# Altium PCB Buck_Boost Converter.PcbDoc
Units mil, origin at the board's own origin, x right, y up, seen from the top; angles counter-clockwise.
Board outline 6095 x 3605 mil, 2 copper layers (Top Layer, Bottom Layer); 28 components, 19 nets, 83 pads, 0 vias.
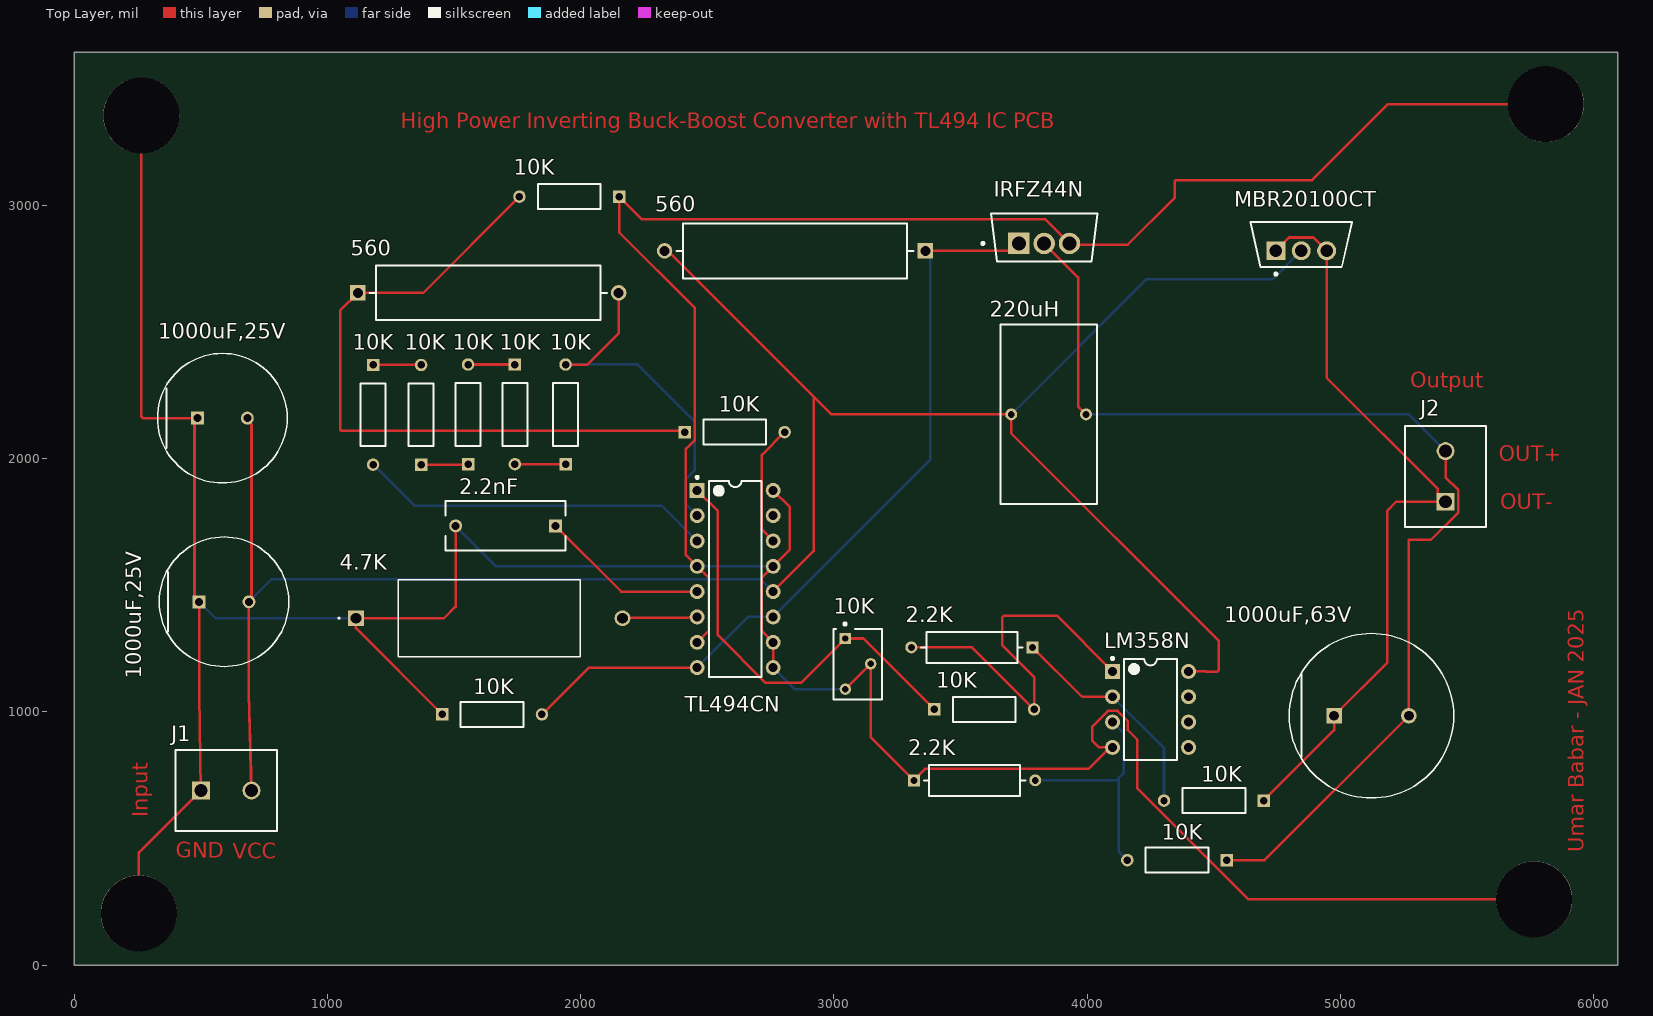
[diagram p0: Top Layer view]
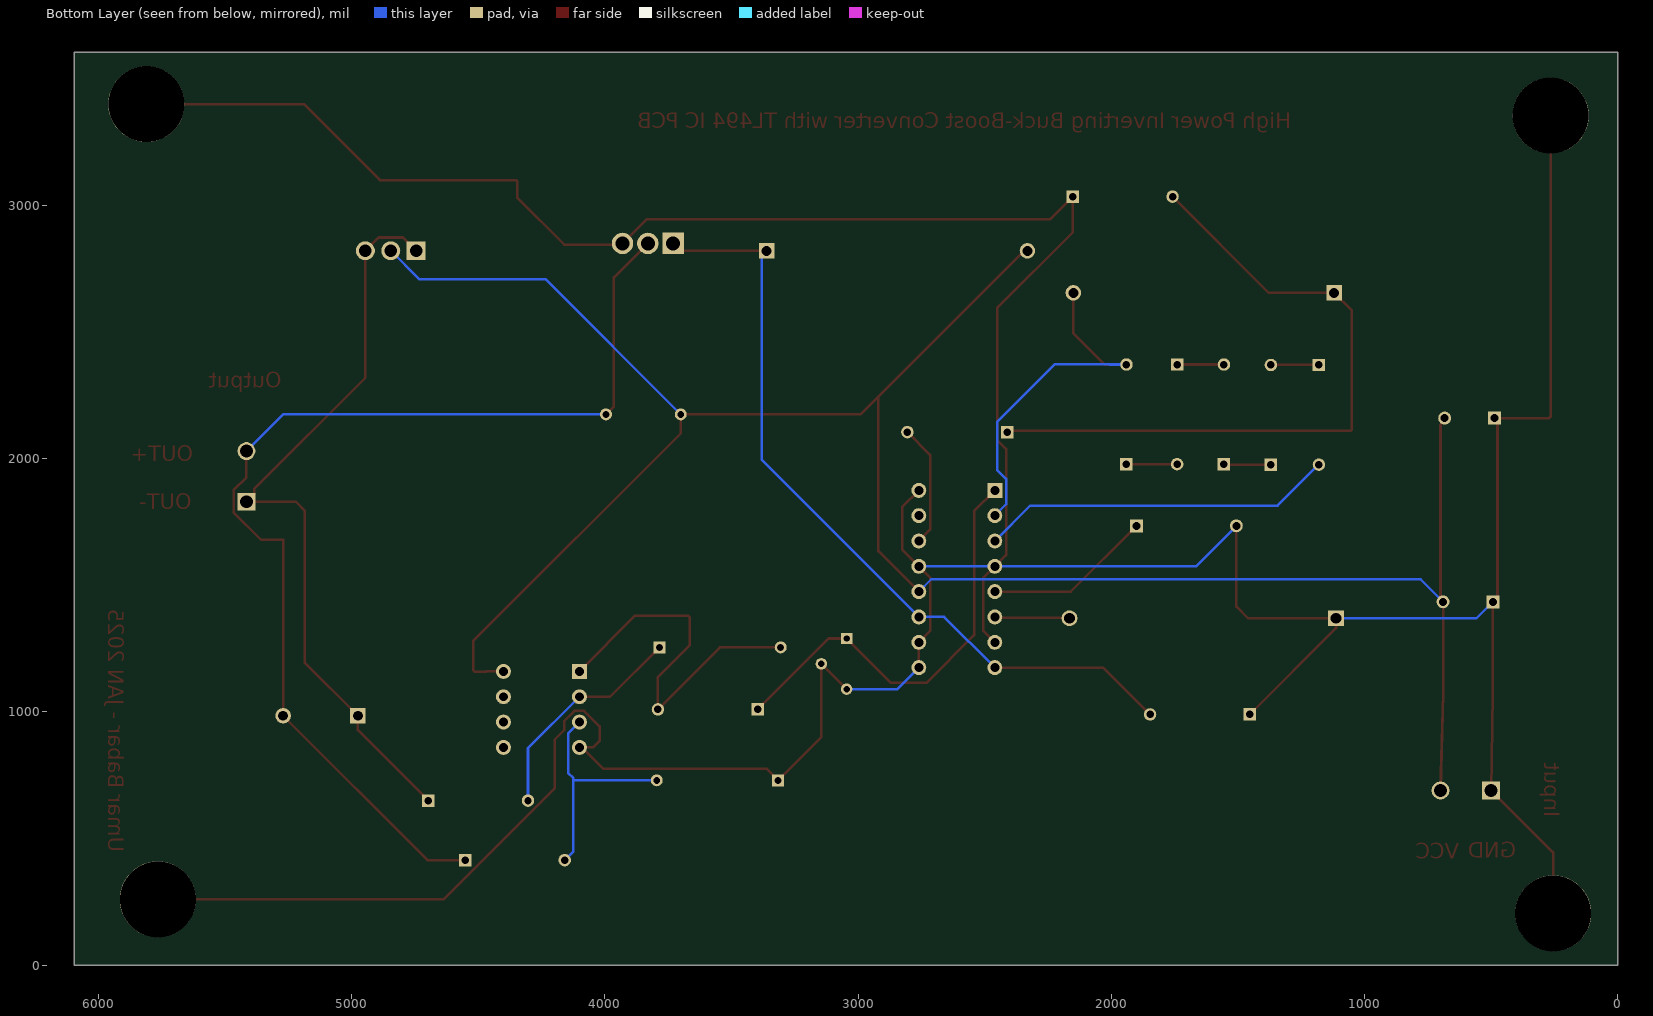
[diagram p1: Bottom Layer view, seen from below]
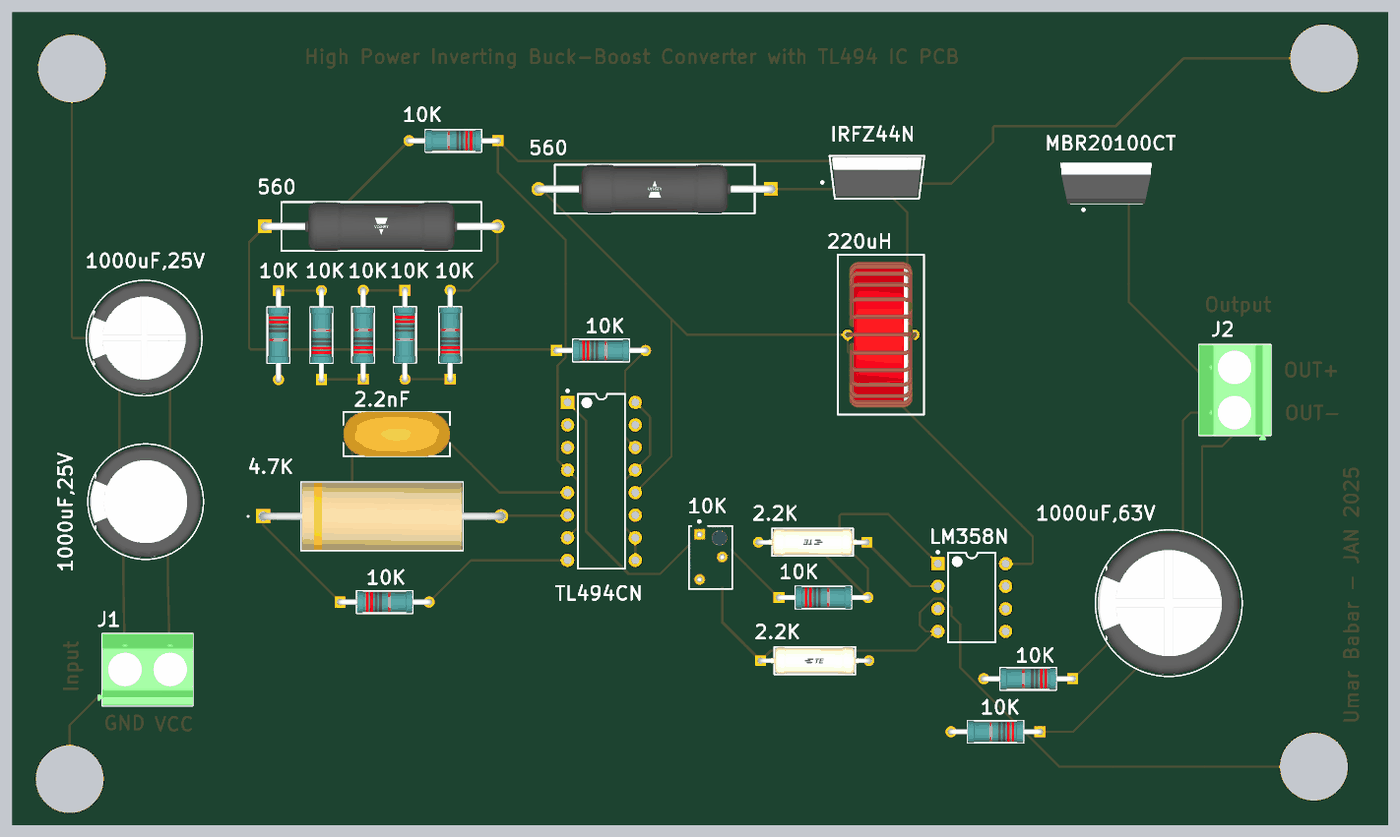
[diagram p2: 3D render of the assembled board from above, using the file's embedded part models]

## Layer stack, top to bottom
Top Solder: solder mask 0.4, Solder Resist, Dk 3.5
Top Layer: signal copper 1.4
Dielectric 1: dielectric 12.6, FR-4, Dk 4.8
Bottom Layer: signal copper 1.4
Bottom Solder: solder mask 0.4, Solder Resist, Dk 3.5

## Board outline
0,0 6095,0 6095,3605 0,3605

## Design rules (kind name [scope] priority, off if disabled: settings)
Clearance [All] p1: gap=10 ignorepadtopadclearanceinfootprint=FALSE
HoleSize [All] p1: absolutevalues=TRUE maxlimit=300 minlimit=1 maxpercent=80.000 minpercent=20.000
PolygonConnect [All] p1: connectstyle=Relief reliefconductorwidth=10 reliefentries=4 polygonreliefangle="90 Angle" airgapwidth=10
RoutingVias [All] p1: holewidth=28 width=50 viastyle="Through Hole" minholewidth=28 minwidth=50 maxholewidth=28 maxwidth=50
SolderMaskExpansion [All] p1: expansion=4 istentingtop=FALSE
SupplyNets "Schematic Supply Nets" [InNet('GND')] p1: voltage=0.000
Width [All] p1: maxlimit=10 minlimit=10 preferedwidth=10
29 further rules are at their usual default settings.

## Components (designator, comment, footprint, x,y, rotation, side; value= is the part's Value field where it differs from the comment)
2.2K "2.2K Ohms" FP-CFR50J2K2-MFG 3555,730 r0 top (schematic designator R14)
2.2K "2.2K Ohms" FP-CFR50J2K2-MFG 3545,1255 r180 top (schematic designator R12)
2.2nF "2.2 nF" FP-VY1470-MFG 1703.15,1735 r180 top (schematic designator C3)
4.7K "4.7K Ohms" RES_AC05_VIS 1112,1370 r0 top (schematic designator R10)
10K "10K Ohms" FP-MBB0207-MFG 1650,990 r0 top (schematic designator R17)
10K "10K Ohms" FP-3266W-MFG 3093.43,1187.83 r270 top value=10kΩ (schematic designator R16)
10K "10K Ohms" FP-MBB0207-MFG 3593.15,1010 r0 top (schematic designator R15)
10K "10K Ohms" FP-MBB0207-MFG 4355,415 r180 top (schematic designator R13)
10K "10K Ohms" FP-MBB0207-MFG 4500,650 r180 top (schematic designator R11)
10K "10K Ohms" FP-MBB0207-MFG 1180,2173.15 r270 top (schematic designator R8)
10K "10K Ohms" FP-MBB0207-MFG 1370,2173.15 r90 top (schematic designator R7)
10K "10K Ohms" FP-MBB0207-MFG 1555,2175 r90 top (schematic designator R6)
10K "10K Ohms" FP-MBB0207-MFG 1740,2175 r270 top (schematic designator R5)
10K "10K Ohms" FP-MBB0207-MFG 1940,2175 r90 top (schematic designator R4)
10K "10K Ohms" FP-MBB0207-MFG 1955,3035 r180 top (schematic designator R2)
10K "10K Ohms" FP-MBB0207-MFG 2608.15,2105 r0 top (schematic designator R1)
220uH "220uH" 744115 3847.64,2175 r270 top (schematic designator L1)
560 "560 Ohms" FP-PAC03-MFG 2846.08,2820.62 r180 top (schematic designator R9)
560 "560 Ohms" FP-PAC03-MFG 1635,2655 r0 top (schematic designator R3)
1000uF,25V "1000uf, 25V" FP-RAD-TH-D_12_5_0_5-L_20-MFG 591.57,1435 r0 top (schematic designator C2)
1000uF,25V "1000uf, 25V" FP-RAD-TH-D_12_5_0_5-L_20-MFG 585,2160 r0 top (schematic designator C1)
1000uF,63V "1000uf, 63V" FP-RAD-TH-D_16_0_5-L_25_2-MFG 5122.36,985 r0 top (schematic designator C4)
IRFZ44N "IRFZ44N" FP-PG-TO262-3-MFG 3830,2872.93 r90 top (schematic designator Q1)
J1 "1729128" PHOE-1729128-2_V 600,690 r0 top
J2 "1729128" PHOE-1729128-2_V 5415,1930 r90 top
LM358N "LM358N" ONSC-PDIP-8-626-05_M 4250,1010 r0 top (schematic designator U2)
MBR20100CT "MBR20100CT" FP-MBR20100CT-E3-4W-MFG 4845,2845 r90 top (schematic designator D1)
TL494CN "TL494CN" N0016A 2610,1525 r0 top (schematic designator U1)

## Footprints (in the part's own frame and the unit in brackets; to place one, negate y for a bottom-side part, rotate by r counter-clockwise, add the part's x,y. Pads: shape width x height; smd on the part's side, far side on the other; paste and mask are expansions set on the pad)
744115 [mm] "THT Leaded Toroidal Storage Choke, body 18x9.7mm"
  round 1.2 hole 0.7: 1(0,3.75) 2(0,-3.75)
  silkscreen extent -9,-4.85 9,4.85, body extent -8.21,-4 8.21,4, height 16.21
FP-3266W-MFG [mm]
  rect 1.15x1.15 hole 0.65 paste-2539.97 mask+0: 1(-2.595,-1.23)
  round 1.15 hole 0.65 paste-2539.97 mask+0: 2(-0.055,1.31) 3(2.485,-1.23)
  silkscreen extent -4.17,-2.44 3.54,2.44, body extent -3.64,-2.54 3.64,2.54, height 0.25
FP-CFR50J2K2-MFG [mm]
  rect 1.2x1.2 hole 0.7 paste-2539.97 mask+0: 1(-6.09,0)
  round 1.2 hole 0.7 paste-2539.97 mask+0: 2(6.09,0)
  silkscreen extent -5.09,-1.55 5.09,1.55, body extent -6.79,-1.65 6.79,1.65, height 0.25
FP-MBB0207-MFG [mm]
  rect 1.25x1.25 hole 0.75 paste-2539.97 mask+0: 1(-5,0)
  round 1.25 hole 0.75 paste-2539.97 mask+0: 2(5,0)
  silkscreen extent -3.15,-1.25 3.15,1.25, body extent -5.72,-1.35 5.72,1.35, height 0.25
FP-MBR20100CT-E3-4W-MFG [mm]
  rect 1.9x1.9 hole 1.25 paste-2539.97 mask+0: 1(-0.61,2.55)
  round 1.9 hole 1.25 paste-2539.97 mask+0: 2(-0.61,0) 3(-0.61,-2.55)
  silkscreen extent -3.07,-5.08 2.25,5.08, body extent -2.45,-5.37 2.45,5.37, height 0.25
FP-PAC03-MFG [mm]
  rect 1.55x1.55 hole 1 paste-2539.97 mask+0: 1(-13.08,0)
  round 1.55 hole 1 paste-2539.97 mask+0: 2(13.08,0)
  silkscreen extent -11.9,-2.75 11.9,2.75, body extent -13.95,-2.85 13.95,2.85, height 0.25
FP-PG-TO262-3-MFG [mm]
  rect 2.15x2.15 hole 1.4 paste-2539.97 mask+0: 1(-0.583,2.54)
  round 2.15 hole 1.4 paste-2539.97 mask+0: 2(-0.583,0) 3(-0.583,-2.54)
  silkscreen extent -2.42,-5.34 2.42,6.27, body extent -2.51,-5.56 2.51,5.56, height 0.25
FP-RAD-TH-D_12_5_0_5-L_20-MFG [mm]
  rect 1.3x1.3 hole 0.8 paste-2539.97 mask+0: 1(-2.5,0)
  round 1.3 hole 0.8 paste-2539.97 mask+0: 2(2.5,0)
  silkscreen extent -6.5,-6.5 6.5,6.5, body extent -6.6,-6.6 6.6,6.6, height 0.25
FP-RAD-TH-D_16_0_5-L_25_2-MFG [mm]
  rect 1.55x1.55 hole 1 paste-2539.97 mask+0: 1(-3.75,0)
  round 1.55 hole 1 paste-2539.97 mask+0: 2(3.75,0)
  silkscreen extent -8.25,-8.25 8.25,8.25, body extent -8.35,-8.35 8.35,8.35, height 0.25
FP-VY1470-MFG [mm]
  rect 1.3x1.3 hole 0.8 paste-2539.97 mask+0: 1(-5,0)
  round 1.3 hole 0.8 paste-2539.97 mask+0: 2(5,0)
  silkscreen extent -6,-2.5 6,2.5, body extent -6.1,-2.6 6.1,2.6, height 0.25
N0016A [mm] "DIP, 16-Leads, Body 19.7x6.6mm, Pitch 2.54mm"
  rect 1.5x1.5 hole 0.9: 1(-3.81,8.89)
  round 1.5 hole 0.9: 2(-3.81,6.35) 3(-3.81,3.81) 4(-3.81,1.27) 5(-3.81,-1.27) 6(-3.81,-3.81) 7(-3.81,-6.35) 8(-3.81,-8.89) 9(3.81,-8.89) 10(3.81,-6.35) 11(3.81,-3.81) 12(3.81,-1.27) 13(3.81,1.27) 14(3.81,3.81) 15(3.81,6.35) 16(3.81,8.89)
  silkscreen extent -3.93,-9.85 2.65,10.31, body extent -3.95,-9.85 3.95,9.85, height 5.08
ONSC-PDIP-8-626-05_M [mm] "DIP, 8-Leads, Body 10x7.1mm, Pitch 2.54mm"
  rect 1.5x1.5 hole 0.9: 1(-3.81,3.81)
  round 1.5 hole 0.9: 2(-3.81,1.27) 3(-3.81,-1.27) 4(-3.81,-3.81) 5(3.81,-3.81) 6(3.81,-1.27) 7(3.81,1.27) 8(3.81,3.81)
  silkscreen extent -3.93,-5.05 2.65,5.23, body extent -3.95,-5 3.95,5, height 5.33
PHOE-1729128-2_V [mm] "Receptacle, 2-Leads, Body 8.1x10.16mm, Pitch 5.08mm"
  rect 1.8x1.8 hole 1.3: 1(-2.54,0)
  round 1.8 hole 1.3: 2(2.54,0)
  silkscreen extent -5.08,-4.05 5.08,4.05, body extent -5.65,-4.05 5.08,4.05, height 10.01
RES_AC05_VIS [mil]
  rect 63x63 / inner round 60 / far side rect 63x63 hole 43 paste-99999 mask+0: 1(0,0)
  round 63 / inner round 60 / far side round 63 hole 43 paste-99999 mask+0: 2(1053,0)
  silkscreen extent -69,-152 886,152, body extent -16,-147 1069,147, height 295

## Part data
2.2K 2.2K: library part CMP-03212-000011-1, "RES 2.2K OHM 5% 1/2W AXIAL", Case/Package=Axial, Max Operating Temperature=155°C, Max Power Dissipation=500mW, Min Operating Temperature=-55°C, Number of Resistors=1, Package Quantity=3000, Resistance=2.2kR, Resistance Tolerance=5%, Resistor Type="Thin Film", Temperature Coefficient=0ppm/°C, Voltage Rating=350V, Diameter=3mm, ELV=Compliant, Length=9mm, Mount=Axial, Number of Terminations=2, Packaging="Cut Tape", Power Rating=500mW, Radiation Hardening=No, REACH SVHC="No SVHC", RoHS Compliant=Yes, Series="CFR50, Neohm", Technology="CARBON FILM", Termination=Axial, Tolerance=5%, Voltage Rating (DC)=350V
2.2nF: library part CMP-02417-000069-1, "CAP CER 2200PF 760VAC Y5U RADIAL", Capacitance=2.2nF, Case/Package=Radial, Dielectric=Y5U, Max Operating Temperature=125°C, Min Operating Temperature=-40°C, Package Quantity=500, Ratings=X1, Resistor Type=Ceramic, Tolerance=20%, Voltage=500V, Construction=RADIAL, Contact Plating=Tin, Depth=5mm, Diameter=12mm, Height=15mm, Height - Seated (Max)=0.63inch, Lead Diameter=0.6mm, Lead Free="Lead Free", Lead Pitch=10mm, Lead/Base Style=Kinked, Mount="Through Hole", Packaging="Tape and Reel", Radiation Hardening=No, RoHS Compliant=Yes, Series=VY1, Termination=Radial, Thickness=5mm, Voltage Rating (AC)=500V, Voltage Rating (DC)=500V, Width=5mm
4.7K: library part CMP-00030-39747417-1, "AC05000004701JAC00 VISHAY AC05000004701JAC00 Through Hole Resistor, AC Series, 4.7 kohm, 5 W, 5%, Axial Leaded", Case/Package=Conformal, Max Operating Temperature=275°C, Max Power Dissipation=5W, Min Operating Temperature=-40°C, Resistance=4.7kΩ, Temperature Coefficient=180ppm/°C, Tolerance=5%, Voltage Rating=153V, Composition=Wirewound, Contact Plating=Tin, Diameter=7.5mm, Features="Flame Retardant Coating", Lead Diameter=800µm, Lead Free="Lead Free", Length=18mm, Military Standard=Not, NexarPartId=39747417, Number of Pins=2, Number of Terminations=2, Packaging="Tape & Box (TB)", Power Rating=5W, Radiation Hardening=No, REACH SVHC=Unknown, RoHS=Compliant, Schedule B="8533210080, 8533210080", Termination=Axial, Voltage Rating (DC)=153V, Width=7.49mm
10K 10K 10K 10K 10K 10K 10K 10K 10K 10K 10K: library part CMP-02408-000035-1, "RES 10K OHM 0.6W 1% AXIAL", Case/Package=Conformal, Max Operating Temperature=155°C, Max Power Dissipation=600mW, Min Operating Temperature=-55°C, Resistance=10kR, Resistance Tolerance=1%, Resistor Type="Metal Film", Temperature Coefficient=50ppm/°C, Voltage Rating=300V, Construction=Cylindrical, Contact Plating=Tin, Diameter=2.5mm, Features="Automotive AEC-Q200", Lead Free="Lead Free", Length=6.5mm, Military Standard=Not, Number of Terminations=2, Packaging="Tape and Reel", Power Rating=600mW, Radiation Hardening=No, RoHS Compliant=Yes, Series="MBB 0207 - Professional", Technology="THIN FILM", Termination=Axial, Tolerance=1%, Voltage Rating (DC)=300V
10K: library part CMP-07234-000016-1, "TRIMMER 10K OHM 0.25W PC PIN TOP", Manufacturer=Bourns, Manufacturer Part Number=3266W-1-103LF, Package=3266W, Power Rating=0.25W, Resistance=10kΩ, Temperature="-55°C to +125°C", Temperature Coefficient=100ppm/°C, Temperature Range High=+125°C, Temperature Range Low=-55°C, Tolerance=10%, Automotive=No, Category=Res, ComponentLink2Description=Datasheet, ComponentLink2URL=https://www.bourns.com/docs/Product-Datasheets/3266.pdf, Composition=Cermet, Device Class L1="Passive Components", Device Class L2=Resistors, Device Class L3="Variable Resistors and Potentiometers", Digikey Description="TRIMMER 10K OHM 0.25W PC PIN TOP", Height=9.02mm, Lead Free=Yes, Mouser Description="Trimmer Resistors - Through Hole 1/4 10Kohms 10% SQ W/Standoff Sealed", Octopart=https://octopart.com/3266w-1-103lf-bourns-81445, RoHS=TRUE, Series=3266, Standoff Height=0.43mm
220uH: library part CMP-03913-22803288-1, "744115 200 µH ±20% Ferrite Toroidal Inductor, 2.2A Idc, 180mO Rdc WE-SI", Ambient Temperature Range High=65°C, Ambient Temperature Range Low=-40°C, Case/Package=Radial, Current Rating=2.2A, DC Resistance (DCR)=180mΩ, Inductance=200µH, Max DC Current=1A, Max Operating Temperature=105°C, Saturation Current=900mA, Self Resonant Frequency=3MHz, Test Frequency=10kHz, Tolerance=20%, Core Material=Ferrite, Depth=9mm, Diameter=18mm, Height=20mm, Lead Pitch=7.5mm, Length=18mm, Min Operating Temperature=-40°C, Mount="Through Hole, Wire", NexarPartId=22803288, Packaging=Bulk, Pin Length=20mm, Pitch=500µm, RoHS=Compliant, Shielding=Unshielded, Width=9.7mm
560 560: library part CMP-02408-000023-1, "RES 560 OHM 3W 1% AXIAL", Case/Package=Axial, Max Operating Temperature=275°C, Max Power Dissipation=3W, Min Operating Temperature=-55°C, Package Quantity=1, Resistance=560R, Resistor Type=Wirewound, Temperature Coefficient=100ppm/°C, Tolerance=1%, Contact Plating=Tin, Diameter=5.5mm, Features="Flame Retardant Coating", Length=0.65inch, Mount="Through Hole", Number of Terminations=2, Packaging="Cut Tape", Power Rating=3W, Radiation Hardening=No, RoHS Compliant=Yes, Series=PAC
1000uF,25V 1000uF,25V: library part CMP-05427-000606-1, "Aluminum Electrolytic Capacitors (Radial Lead Type) 1000uF ±20% 25V", Capacitance=1mF, Case/Package=Radial, Dielectric Material=Aluminium, ESR (Equivalent Series Resistance)=18mR, Max Operating Temperature=105°C, Min Operating Temperature=-40°C, Package Quantity=200, Ripple Current=2.6A, Tolerance=20%, Voltage=25V, Construction=RADIAL, Contact Plating=Tin, Diameter=12.5mm, Dissipation Factor=0.14%, Features="General Purpose", Height=20mm, Height - Seated (Max)=0.787inch, Impedance=18mR, Lead Diameter=0.6mm, Lead Free="Lead Free", Lead Length=17mm, Lead Pitch=5mm, Length=20mm, Life (Hours)=5000Hour, Mount="Through Hole", Packaging=Bulk, Radiation Hardening=No, REACH SVHC=Yes, RoHS Compliant=Yes, Series=FM, Termination=Radial, Voltage Rating=25V, Voltage Rating (DC)=25V
1000uF,63V: library part CMP-05427-000837-1, "Aluminum Electrolytic Capacitors (Radial Lead Type) AEC-Q200 Qualified 1000uF ±20% 63V", Capacitance=1mF, Case/Package=Radial, Max Operating Temperature=105°C, Min Operating Temperature=-55°C, Package Quantity=250, Ripple Current=930mA, Tolerance=20%, Voltage Rating=63V, Contact Plating=Tin, Diameter=16mm, Height=25mm, Height - Seated (Max)=1.063inch, Lead Diameter=0.8mm, Lead Pitch=7.5mm, Lead/Base Style=Straight, Length=25mm, Life (Hours)=2000Hour, Mount="Through Hole", Packaging="Tape and Reel", Radiation Hardening=No, RoHS Compliant=Yes, Series=NHG, Termination=Radial, Voltage Rating (DC)=63V
IRFZ44N: library part CMP-00196-65874408-1, "IRFZ44NLPBF Single N-Channel 55 V 17.5 mOhm 63 nC HEXFET® Power Mosfet - TO-262", Case/Package=TO-262, Continuous Drain Current (ID)=49A, Drain to Source Breakdown Voltage=55V, Drain to Source Resistance=17.5mΩ, Gate to Source Voltage (Vgs)=20V, Input Capacitance=1.47nF, Max Junction Temperature (Tj)=175°C, Max Power Dissipation=3.8W, Min Operating Temperature=-55°C, Package Quantity=1000, Power Dissipation=110W, Resistance=17.5MΩ, Threshold Voltage=4V, Current Rating=49A, Drain to Source Voltage (Vdss)=55V, Dual Supply Voltage=55V, Element Configuration=Single, Fall Time=45ns, Height=9.65mm, Lead Free="Contains Lead, Lead Free", Length=10.668mm, Lifecycle Status=Production, Max Operating Temperature=175°C, Mount="Through Hole", NexarPartId=65874408, Nominal Vgs=4V, Number of Channels=1, Number of Elements=1, Number of Pins=3, On-State Resistance=17.5mΩ, Packaging=Bulk, Radiation Hardening=No, Rds On Max=17.5mΩ, REACH SVHC="No SVHC", Rise Time=60ns, RoHS=Compliant, Schedule B="8541290080, 8541290080", Termination="Through Hole", Turn-Off Delay Time=44ns, Turn-On Delay Time=12ns, Voltage Rating (DC)=55V, Width=4.826mm
J1 J2: library part CMP-2000-05815-1, "PCB Terminal Block, 13.5 A, 400 V, 2-Pin THD, RoHS, Bulk", Current Rating=13500mA, Manufacturer="Phoenix Contact", Package Description="2-Pin Through Hole Device, Body 8.1 x 10.16 mm, Pitch 5.08 mm", Package Reference=1729128-2, Package Version=03/2015, Voltage Rating=400V, Datasheet URL=https://datasheet.ciiva.com/16046/1729128-16046181.pdf, Datasheet Version=12/2013, Manufacturer URL=http://www.phoenixcontact.com/, Mounting Technology=ThroughHole, No. of Positions=2, No. of Rows=1, Orientation=Horizontal, Package URL=https://www.phoenixcontact.com/online/portal/pi/pxc/product_detail_page/!ut/p/b1/3VdJjqNKFDxLH8AFycySyWY2ozFsEPOMMQaDOX1XedGL_1Vdm5YXJleknhSKeBkvI6EA8ncAo3AYoDhBQGco6KN7VURTdemj9us_IEKEZo_YHiPAEWEFmDGOHMORkqKYCORBZxgL7ZoaZYcbFFUZ3fqxSY6GOuxydWUuHqz1ynmMFygu583Bob0Ewr6Sd_l-5m-kAueHiB0jpRwZwe58wwtkpxtMYd_LmGcDRU02dRNEyWt6Y2ti5pSyJ_reIkzIulrqApdnbT11V5jnCKbYNCvhEM1MCpPByat_X379-iThf08CI5GfOPqfBeS3BRoBOdD55AKVv0iLwCMq-2BrzXWSGRH7pUGD9uwXQjiph3xL0DKQwdGa0JImiIOmBNOestqgwTHSSs2oOep-78apyXQBvNi8ZLaFjvjWvcaUEBu0MC6Wbe-d6mB0FAebo2lUWinqYaZs5DAYzV0RP9yitUjnGJ0iI9xhZkT42OCQNUJJhkgWINNQLP2JFP6OpMg3JCVg70jqHT0lvKOnhHf0lPuOnnLf0VPuWx6_dxwUIvwk5WMkT0kLL1mh61l2yZVSzG3pYV_bqo-mj6uMKwKwdnnW8Jh5RTOJzMOA5c-eJDaZQw4mTMPH02PvS_ZAqNVjVTo2WyYLkwH_KU1mmmG5kjRhDqPXLwwVHvVOjCM60-fpXvTDfMGW1PVFVS1r4e4yVDk4ZdNbkUHvqPqQSeian4UD39fNKmachqdJ1NJbyk8rXT9mXTvPk3oE5meulKGgiruPJek-4I9hTT6G8ZLOyRSm2RRVbThERQad5OS28hdt4YW4vG0stgYYzsWsK4_7y6DZMjJSCqri1kyiZR5vD7pwIrNR7QwPHTcLTI5qT7eRlpHrdGiupYlqQDJ7zy_CND8fWWBoLRXxk1RVcXiBQwbTD4Xi7KL-FuO94t9xaqweXzH, Packing=Bulk, PartNumber=1729128, Pitch=5.08mm, RoHS=TRUE
LM358N: library part CMP-1310-00098-1, "Single Supply Dual Operational Amplifier, 3 to 32 V, 0 to 70 degC, 8-Pin PDIP, Tube", Manufacturer="On Semiconductor", ComponentLink1Description="Manufacturer URL", ComponentLink1URL=http://www.onsemi.com/, ComponentLink2Description=Datasheet, ComponentLink2URL=http://www.onsemi.cn/pub_link/Collateral/LM358-D.PDF, ComponentLink3Description="Package Specification", ComponentLink3URL=http://www.onsemi.com/pub_link/Collateral/LM211-D.PDF, DatasheetVersion="Rev. 27", Mounting Technology="Through Hole", PackageDescription="8-Pin Plastic Dual-In Line Package, Body 9.52 x 6.605 mm, Pitch 2.54 mm", PackageReference=PDIP-8-626-05, PackageVersion="Rev. M, 04/2010", Packing=Tube, PartNumber=LM358N, RoHS=FALSE, VCC Max (V)=32, VCC Min (V)=3
MBR20100CT: library part CMP-00030-42878425-1, "MBR20100CT-E3/4W Dual Common-Cathode High-Voltage Schottky Rectifier", Average Rectified Current=10A, Case/Package=TO-220AB, Forward Current=20A, Forward Voltage=800mV, Max Forward Surge Current (Ifsm)=150A, Max Junction Temperature (Tj)=150°C, Max Repetitive Reverse Voltage (Vrrm)=100V, Max Reverse Leakage Current=100µA, Min Operating Temperature=-65°C, Element Configuration="Common Cathode", Height=15.3162mm, Lead Free="Lead Free", Length=10.5156mm, Max Operating Temperature=150°C, Max Reverse Voltage (DC)=100V, Max Surge Current=150A, Mount="Through Hole", NexarPartId=42878425, Number of Pins=3, Peak Non-Repetitive Surge Current=150A, Peak Reverse Current=100µA, Radiation Hardening=No, Reverse Voltage=100V, RoHS=Compliant, Schedule B="8541100080, 8541100080", Width=4.699mm
TL494CN: library part CMP-0319-00147-2, "Pulse-Width-Modulation Control Circuit with Voltage Control, 45 % Duty Cycle, 0 to +70 degC, 16-pin PDIP (N), Pb-Free (RoHS)", Frequency(Max)(kHz)=300, Manufacturer="Texas Instruments", Rating=Military, Code_JEDEC=MS-001*, ComponentLink1Description=Datasheet, ComponentLink1URL=http://www.ti.com/general/docs/lit/getliterature.tsp?genericPartNumber=TL494&fileType=pdf, Control Method=Voltage, DatasheetVersion=SLVS074E, Duty Cycle(Max)(%)=45, Eco-Plan="Pb-Free (RoHS)", Mounting Technology="Through Hole", PackageDescription="16-Pin Plastic Dual-In-Line Package, Row Spacing 7.62 mm, Pitch 2.54 mm", PackageReference=N0016A, PackageVersion="revE, Dec-2002", PartNumber=TL494CN, Regulated Outputs(#)=2, SubFamily="PWM Controller", Topology="Boost, Buck, Flyback, Forward, Full-Bridge, Half-Bridge, Push-Pull"

## Free pads (board coordinates)
  round 300 hole 300: MH1(255,205) MH2(265,3355) MH3(5810,3400) MH4(5765,260)

## Nets (pads, with @x,y where several pads share a name; then routed paths per layer and width w, separated by ;. In a path a pad name is that pad's centre, name@x,y a point inside that pad or via, vN(x,y) a via of type N, cw(c..) or ccw(c..) an arc to the next point about the centre after c; other vN are vias at no path point)
GND: 2.2K.1@3315.24,730 2.2nF.2 4.7K.1 10K.1@1453.15,990 10K.1@2151.85,3035 10K.2@3145,1190 10K.3 1000uF,25V.1 IRFZ44N.3 J1.1 LM358N.4 pad.MH1 pad.MH2 pad.MH3 pad.MH4 TL494CN.4 TL494CN.7 TL494CN.9 TL494CN.10 TL494CN.13 TL494CN.16 | length 17920.1
  Top Layer w10: pad.MH1 255,445 J1.1 493.15,1068.85 493.15,1435 475,1453.15 475,2148.43 486.57,2160 270.86,2160 265,2165.86 pad.MH2 pad.MH2@324.97,3399.97 ; 10K.1@1453.15,990 1112,1331.15 4.7K.1 1460,1370 1506.3,1416.3 2.2nF.2 ; TL494CN.7 2505,1320 2505,1530 TL494CN.4 2415.47,1619.53 2415.47,2038.75 2450.91,2074.18 2450.91,2595.09 2151.85,2894.15 2151.85,3035 2241.85,2945 3835,2945 IRFZ44N.3 3935,2845 4160,2845 4345,3030 4345,3094.14 4350.86,3100 4888.26,3100 5188.26,3400 pad.MH3 ; TL494CN.9 TL494CN.10 2715,1320 2715,1530 TL494CN.13 2824.53,1639.53 2824.53,1810.47 TL494CN.16 ; 10K.3 3145,1190 3145,900.24 3315.24,730 3360.24,775 4005,775 4090,860 LM358N.4 4045.86,860 4020,885.86 4020,942.97 4081.56,1004.53 4119.61,1004.53 4160,964.14 4160,928.28 4198.15,890.13 4198.15,698.27 4636.42,260 pad.MH4 pad.MH4@5775,283.49 ; pad.MH3@5760.03,3399.97 pad.MH3 ; pad.MH3@5800,3281.53 pad.MH3
  Bottom Layer w10: 486.57,1441.58 493.15,1435 558.15,1370 4.7K.1 ; 2.2nF.2 1666.3,1575 TL494CN.4 TL494CN.13 ; TL494CN.9 2845,1090 10K.3
NetC1_2: 220uH.2 560.2@2331.12,2820.62 1000uF,25V.2 J1.2 LM358N.8 MBR20100CT.2 TL494CN.12 | length 8965.9
  Top Layer w10: 683.43,2160 683.43,2150.13 700,2133.55 700,1456.14 690,1446.14 690,1073 J1.2 ; 560.2@2331.12,2820.62 2344.42,2820.62 2920,2245.04 ; TL494CN.12 2920,1635 2920,2245.04 ; LM358N.8 4467.97,1160 4468.83,1159.14 4514.14,1159.14 4520,1165 4520,1280 3700,2100 220uH.2 2990.04,2175 2920,2245.04
  Bottom Layer w10: 690,1435 779,1524 2711,1524 TL494CN.12 ; 220uH.2 4234,2709 4733.02,2709 MBR20100CT.2
NetC3_1: 2.2nF.1 TL494CN.5 | length 667.7
  Top Layer w10: 2.2nF.1 2160,1475 TL494CN.5
NetC4_1: 10K.1@4696.85,650 1000uF,63V.1 J2.1 MBR20100CT.1 MBR20100CT.3 | length 3021.4
  Top Layer w10: 10K.1@4696.85,650 4974.72,927.87 4974.72,985 5185,1195.28 5185,1795 5220,1830 J2.1 5384.57,1860.43 5384.57,1880.43 4945.39,2319.61 MBR20100CT.3 4892.99,2873.39 4797.01,2873.39 MBR20100CT.1
NetC4_2: 10K.1@4551.85,415 220uH.1 1000uF,63V.2 IRFZ44N.2 J2.2 | length 4375.3
  Top Layer w10: IRFZ44N.2 3964,2716 3964,2206.28 220uH.1 ; 10K.1@4551.85,415 4700,415 5270,985 5270,1680 5357.08,1680 5465.43,1788.35 5465.43,1875.73 5415,1926.16 J2.2
  Bottom Layer w10: 220uH.1 5270,2175 J2.2
NetQ1_1: 10K.2@1846.85,990 560.1@3361.04,2820.62 IRFZ44N.1 TL494CN.8 TL494CN.11 | length 3205.6
  Top Layer w10: 10K.2@1846.85,990 2031.85,1175 TL494CN.8 ; 560.1@3361.04,2820.62 3700.62,2820.62 IRFZ44N.1
  Bottom Layer w10: TL494CN.8 2660,1375 TL494CN.11 3379.96,1994.96 3379.96,2801.7 560.1@3361.04,2820.62 ; IRFZ44N.1@3700.62,2820.62 IRFZ44N.1
NetR1_1: 10K.1@2411.3,2105 10K.2@1758.15,3035 560.1@1120.04,2655 | length 2729.5
  Top Layer w10: 10K.2@1758.15,3035 1378.15,2655 1120.04,2655 1050,2584.96 1050,2115.86 1055.86,2110 2406.3,2110 10K.1@2411.3,2105
NetR1_2: 10K.2@2805,2105 TL494CN.14 | length 485.9
  Top Layer w10: TL494CN.14 2715,1720 2715,2015 10K.2@2805,2105
NetR3_2: 10K.2@1940,2371.85 560.2@2149.96,2655 TL494CN.2 | length 1498.2
  Top Layer w10: 10K.2@1940,2371.85 1941.85,2370 2025,2370 2149.96,2494.96 560.2@2149.96,2655
  Bottom Layer w10: 10K.2@1940,2371.85 2006.85,2371.85 ; 10K.2@1940,2372.52 2223.48,2372.52 2451,2145 2451,1956 2415,1920 2415,1820 TL494CN.2
NetR4_1: 10K.1@1940,1978.15 10K.2@1740,1978.15 | length 200
  Top Layer w10: 10K.2@1740,1978.15 10K.1@1940,1978.15
NetR5_1: 10K.1@1740,2371.85 10K.2@1555,2371.85 | length 185
  Top Layer w10: 10K.2@1555,2371.85 10K.1@1740,2371.85
NetR6_1: 10K.1@1370,1976.3 10K.1@1555,1978.15 | length 185.8
  Top Layer w10: 10K.1@1370,1976.3 1553.15,1976.3 10K.1@1555,1978.15
NetR7_2: 10K.1@1180,2370 10K.2@1370,2370 | length 190
  Top Layer w10: 10K.1@1180,2370 10K.2@1370,2370
NetR8_2: 10K.2@1180,1976.3 TL494CN.3 | length 1398.5
  Bottom Layer w10: 10K.2@1185,1973.15 1343.15,1815 2320,1815 TL494CN.3
NetR10_2: 4.7K.2 TL494CN.6 | length 297.1
  Top Layer w10: 4.7K.2 2167.5,1372.5 2457.5,1372.5 TL494CN.6
NetR11_2: 2.2K.1@3784.76,1255 10K.2@4303.15,650 LM358N.2 | length 890.2
  Top Layer w10: 2.2K.1@3784.76,1255 3979.76,1060 LM358N.2
  Bottom Layer w10: LM358N.2 4303.15,856.85 10K.2@4303.15,650
NetR12_2: 2.2K.2@3305.24,1255 10K.2@3790,1010 LM358N.1 | length 1541.3
  Top Layer w10: 2.2K.2@3305.24,1255 3545,1255 3790,1010 3790,1137.81 3665,1262.81 3665,1374.14 3670.86,1380 3880,1380 LM358N.1
  Bottom Layer w10: 10K.2@3782.5,1017.5 10K.2@3790,1010
NetR13_2: 2.2K.2@3794.76,730 10K.2@4158.15,415 LM358N.3 | length 921.8
  Top Layer w10: LM358N.3 LM358N.3@4104.53,955.47
  Bottom Layer w10: 2.2K.2@3794.76,730 4124.14,730 ; LM358N.3 4144.53,915.47 4144.53,758.67 4124.14,738.28 4124.14,449.01 10K.2@4158.15,415
NetR15_1: 10K.1@3045,1290 10K.1@3396.3,1010 TL494CN.1 | length 1726.6
  Top Layer w10: TL494CN.1 2542,1793 2542,1303 2730,1115 2870,1115 3045,1290 3116.3,1290 10K.1@3396.3,1010
pads on no net: LM358N.5 LM358N.6 LM358N.7 TL494CN.15

## Other copper
Top Layer:
  text "High Power Inverting Buck-Boost Converter with TL494 IC PCB" at 1290,3305 h60
  text "Output" at 5275,2279.99 h60
  text "OUT+" at 5625,1990 h60
  text "OUT-" at 5630,1800 h60
  text "Input" at 290.01,585 h60 r90
  text "Umar Babar - JAN 2025" at 5960,445 h60 r90
  text "GND" at 400,425 h60
  text "VCC" at 625,420 h60

## Silkscreen, mask and mechanical layers (free items; w line width, h text height)
Mechanical 1:
  the board outline again, w10